# Altium PCB Main.PcbDoc
Units mil, origin at the board's own origin, x right, y up, seen from the top; angles counter-clockwise.
Board outline 2427.55 x 1498.92 mil, 2 copper layers (Top Layer, Bottom Layer), stack 61.756 mil thick; 34 components, 26 nets, 146 pads, 46 vias.
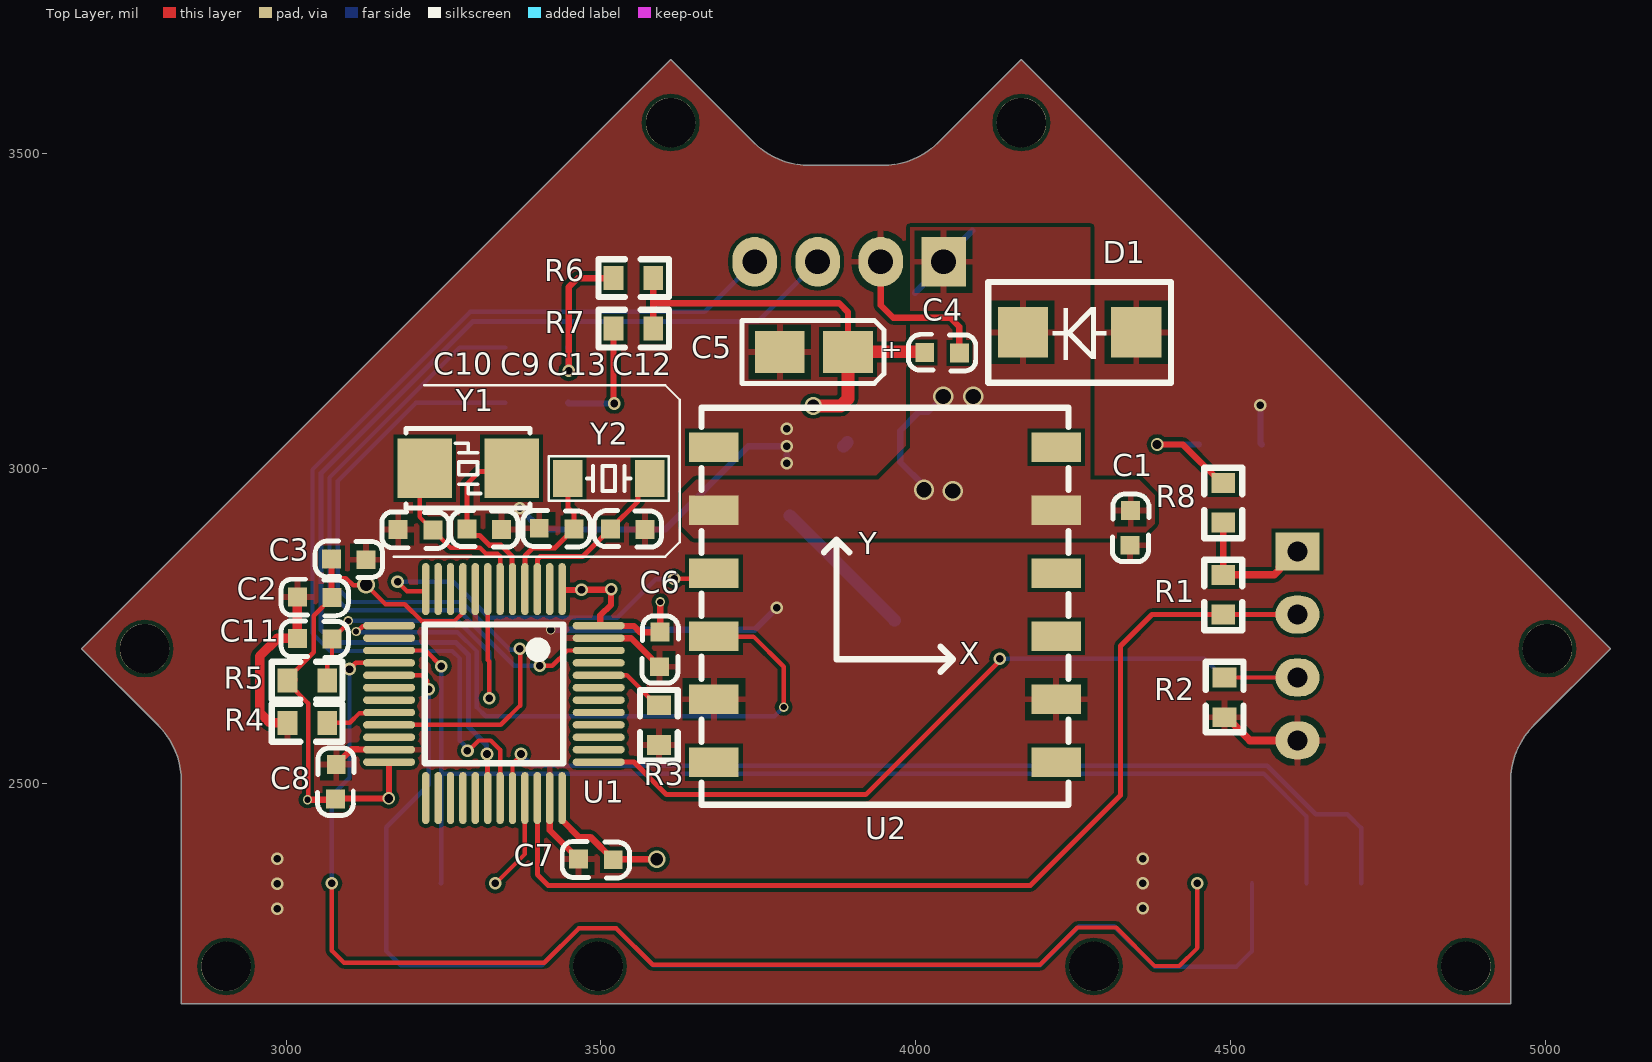
[diagram p0: Top Layer view]
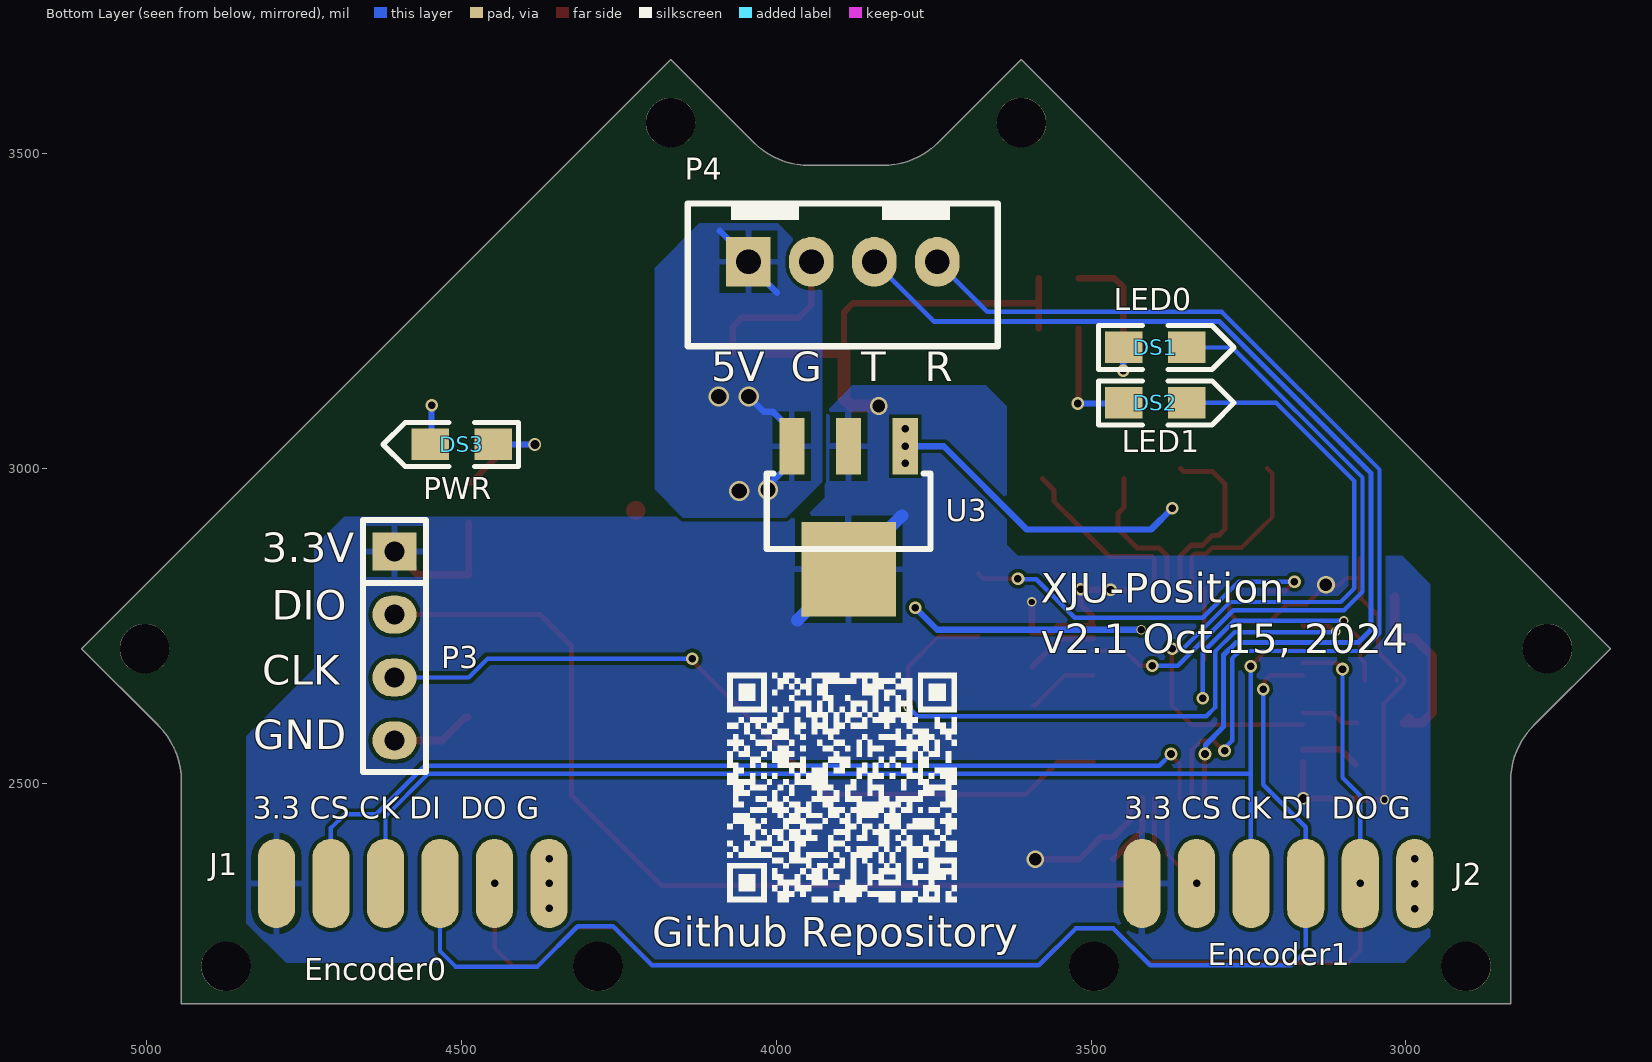
[diagram p1: Bottom Layer view, seen from below]
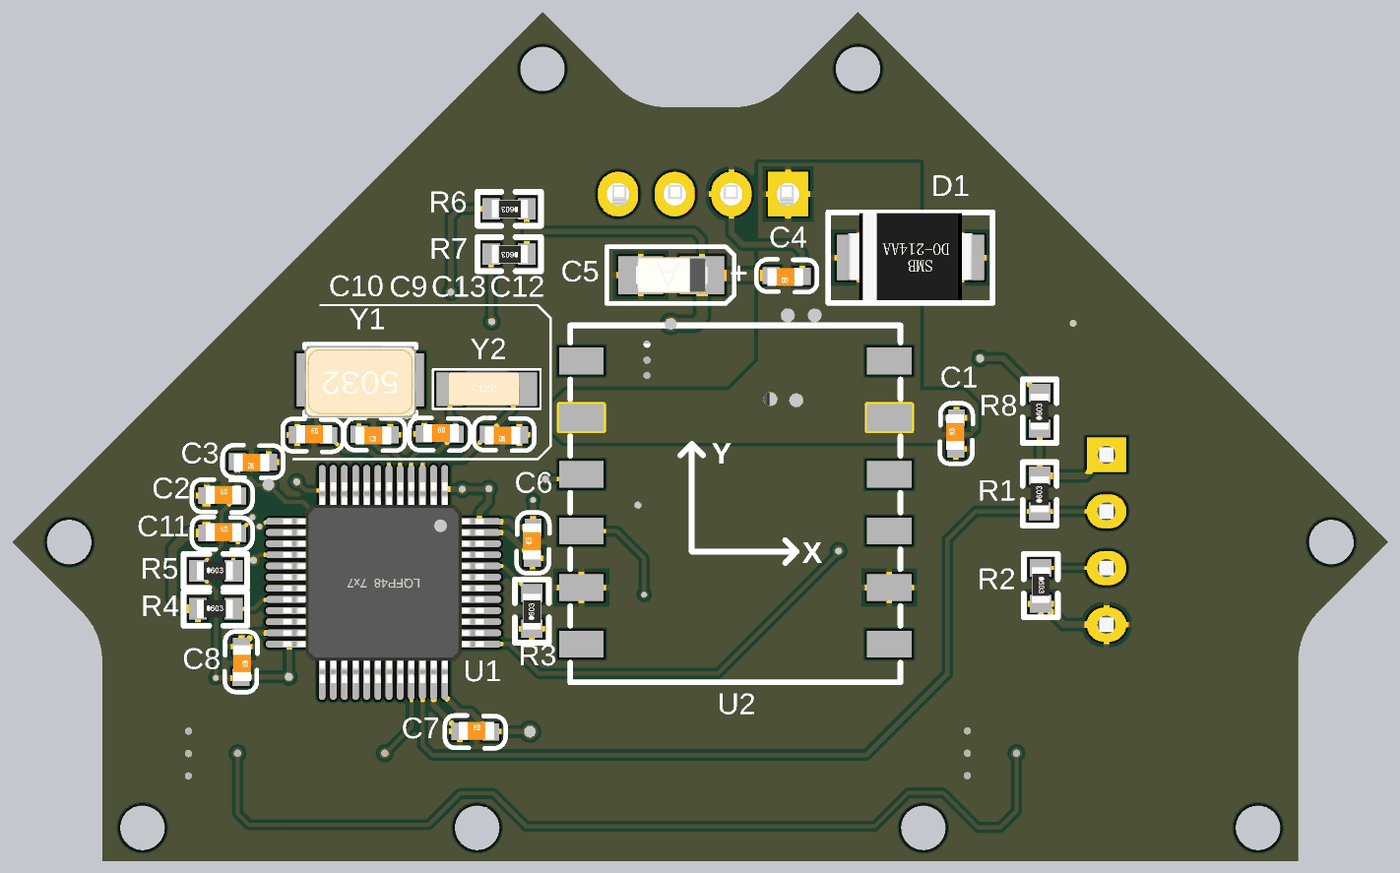
[diagram p2: 3D render of the assembled board from above, using the file's embedded part models]
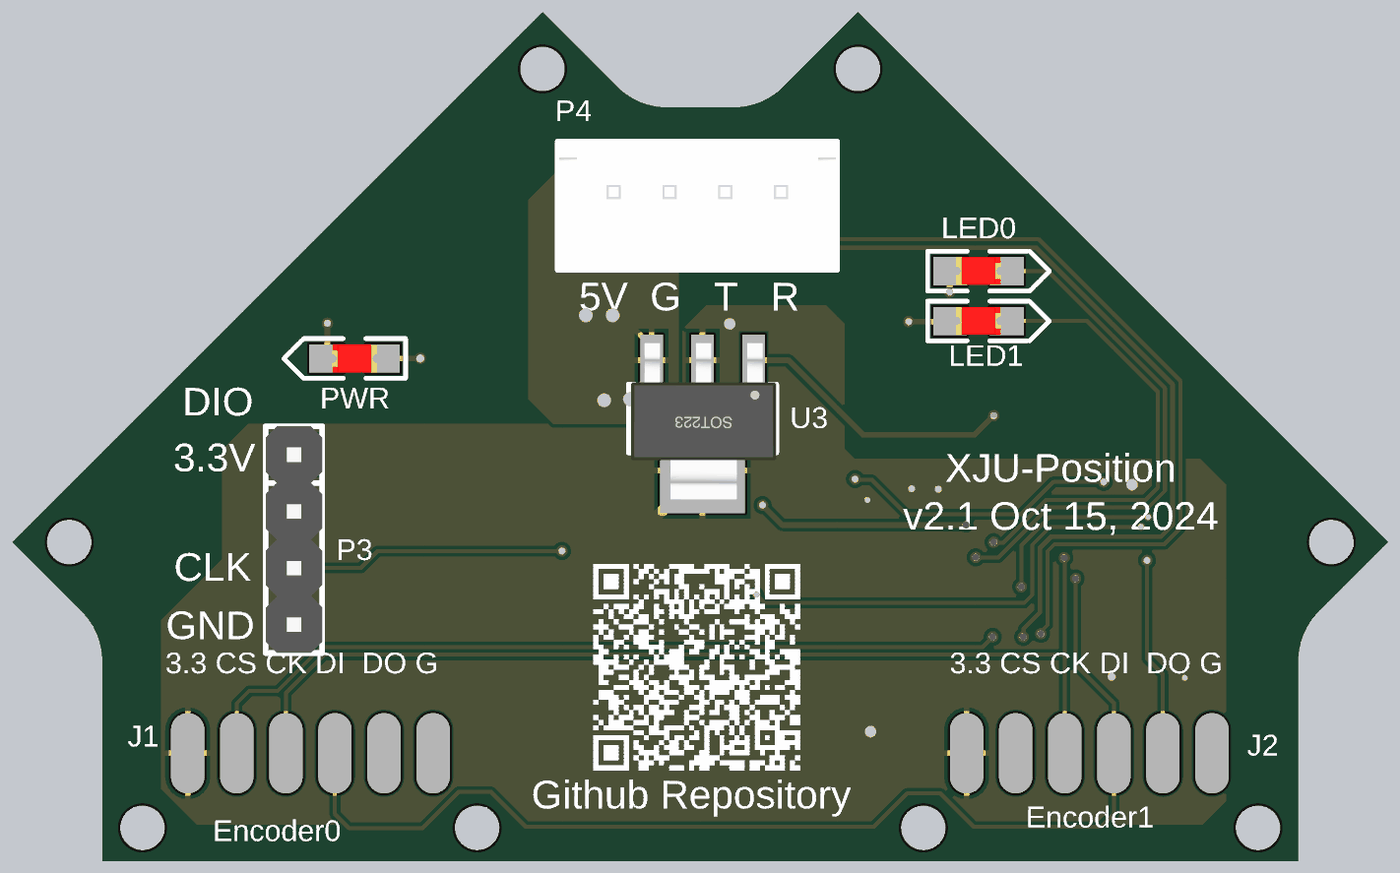
[diagram p3: 3D render of the assembled board from below, using the file's embedded part models]

## Layer stack, top to bottom
Top Solder: solder mask 1, SM-001, Dk 4
Top Layer: signal copper 1.378
Dielectric 1: core 59, Core-043, Dk 4.3
Bottom Layer: signal copper 1.378
Bottom Solder: solder mask 1, SM-001, Dk 4

## Board outline
2833.91,2150.25 2833.91,2502.94 ccw(c2707.92,2502.94) 2797.01,2592.03 2675.25,2713.78 3610.64,3649.17 3741.94,3517.86 ccw(c3831.03,3606.94) 3831.03,3480.96 3947.02,3480.96 ccw(c3947.02,3606.94) 4036.1,3517.86 4167.41,3649.17 5102.8,2713.78 4981.04,2592.03 ccw(c5070.13,2502.94) 4944.14,2502.94 4944.14,2150.25

## Design rules (kind name [scope] priority, off if disabled: settings)
Clearance [All] p1: gap=6 ignorepadtopadclearanceinfootprint=FALSE
DiffPairsRouting [All] p1: maxlimit=10 minlimit=6 mostfreqgap=6 toplayer_minwidth=6 toplayer_maxwidth=15 toplayer_prefwidth=6 bottomlayer_minwidth=6 bottomlayer_maxwidth=15 bottomlayer_prefwidth=6 maxuncoupledlength=500
HoleToHoleClearance [All] p1: gap=6 allowstackedmicrovias=TRUE
MinimumSolderMaskSliver [All] p1: minsoldermaskwidth=1
PolygonConnect [All] p1: thpad.connectstyle=Relief thpad.reliefconductorwidth=10 thpad.reliefentries=4 thpad.polygonreliefangle="90 Angle" thpad.airgapwidth=10 smdpad.connectstyle=Relief smdpad.reliefconductorwidth=10 smdpad.reliefentries=4 smdpad.polygonreliefangle="90 Angle" smdpad.airgapwidth=10 via.connectstyle=Direct via.reliefconductorwidth=10 via.reliefentries=4 via.polygonreliefangle="90 Angle" via.airgapwidth=10
RoutingVias [All] p1: holewidth=12 width=50 viastyle="Through Hole" minholewidth=9.84 minwidth=11.81 maxholewidth=248.03 maxwidth=50
SilkToSilkClearance [All] p1: silktosilkclearance=0
SilkToSolderMaskClearance [IsPad] p1: minsilkscreentomaskgap=0 clearancetoexposedcopper=TRUE
SolderMaskExpansion [All] p1: expansion=4 istentingtop=FALSE
Width [All] p1: maxlimit=50 minlimit=7 preferedwidth=10
25 further rules are at their usual default settings.

## Components (designator, comment, footprint, x,y, rotation, side; value= is the part's Value field where it differs from the comment)
C1 "Capacitor" 0603C 4339.65,2877.79 r90 top value=104
C2 "Capacitor" 0603C 3017.79,2796.35 r0 top value=104
C3 "Capacitor" 0603C 3127.21,2854.65 r180 top value=10uF
C4 "Capacitor" 0603C 4069.21,3182.65 r180 top value=104
C5 "Capacitor" TAJ-A/3216 3894,3185 r180 top value=10uF/16V
C6 "Capacitor" 0603C 3592.65,2684.79 r90 top value=100nF
C7 "Capacitor" 0603C 3464.29,2379.96 r0 top value=100nF
C8 "Capacitor" 0603C 3080,2530 r270 top value=100nF
C9 "Capacitor" 0603C 3342.21,2902.65 r180 top value=22pF
C10 "Capacitor" 0603C 3177.79,2903.35 r0 top value=22pF
C11 "Capacitor" 0603C 3017.79,2730.35 r0 top value=104
C12 "Capacitor" 0603C 3570.21,2902.64 r180 top value=8pF
C13 "Capacitor" 0603C 3401.79,2905.35 r0 top value=8pF
D1 "TVS Diode" SMB/DO-214AA 4350,3216 r180 top value=SMBJ5.0A
DS1 "LED0" LED-0805R 3448.01,3192.02 r180 bottom value=Blue
DS2 "LED1" LED-0805R 3448.01,3104.01 r180 bottom value=Red
DS3 "PWR" LED-0805R 4449,3037.99 r0 bottom value=Green
J1 "Encoder0" 6P_SMD 4793.46,2341 r180 bottom
J2 "Encoder1" 6P_SMD 3419,2341 r180 bottom
P3 "SWD" "Pin HDR1X4/2.54mm-S" 4606,2868 r180 bottom
P4 "Data IO" XH4/2.54mm/180 4044,3328 r180 bottom
R1 "Resistor" 0603R 4488,2768 r90 top value=10K
R2 "Resistor" 0603R 4490,2668 r270 top value=10K
R3 "Resistor" 0603R 3592,2561.01 r90 top value=10K
R4 "Resistor" 0603R 3002.47,2596 r0 top value=10K
R5 "Resistor" 0603R 3002.47,2663.02 r0 top value=10K
R6 "Resistor" 0603R 3582.99,3302 r180 top value=510R
R7 "Resistor" 0603R 3582.99,3222 r180 top value=510R
R8 "Resistor" 0603R 4488,2914 r90 top value=510R
U1 "ST MCU LQFP48" "LQFP48 7X7" 3330,2642 r180 top value=STM32F103C8T6
U2 "JY901S" JY901S 3954,2787 r0 top
U3 "AMS1117-3.3" SOT223 3885,3035 r0 bottom
Y1 "Crystal Oscillator" "OSC 5032-2P" 3289.1,3000 r180 top value=8MHz
Y2 "Crystal Oscillator" "OSC 3215-2P" 3512.29,2983.92 r180 top value=32.768kHz

## Footprints (in the part's own frame and the unit in brackets; to place one, negate y for a bottom-side part, rotate by r counter-clockwise, add the part's x,y. Pads: shape width x height; smd on the part's side, far side on the other; paste and mask are expansions set on the pad)
6P_SMD [mm]
  oval 1.5x3.6 smd: 1(0,0) 2(2.2,0) 3(4.4,0) 4(6.6,0) 5(8.8,0) 6(11,0)
0603C [mil]
  rect 30x30 smd: 1(0.21,-0.35) 2(55.21,-1.35)
  silkscreen extent -26,-30 81,28, body extent -1,-15 62,17, height 12
0603R [mm]
  rect 0.8x0.965 smd: 1(0,0) 2(1.6,0)
  silkscreen extent -0.64,-0.76 2.21,0.76, body extent -0.04,-0.41 1.56,0.41, height 0.45
JY901S [mm]
  rect 2x1.2 smd: 1(-6.976,6.26) 2(-6.976,3.72) 3(-6.976,1.18) 4(-6.976,-1.36) 5(-6.976,-3.9) 6(-6.976,-6.44) 7(6.824,-6.44) 8(6.824,-3.9) 9(6.824,-1.36) 10(6.824,1.18) 11(6.824,3.72) 12(6.824,6.26)
  silkscreen extent -7.48,-8.15 7.32,7.85
LED-0805R [mil]
  rect 60x50 smd: A(0,0) K(100,0)
  silkscreen extent -40,-35 175,35, body extent 11,-24 89,25, height 32
"LQFP48 7X7" [mm]
  oval 0.3x2.1 smd: 1(-2.75,-4.227) 2(-2.25,-4.227) 3(-1.75,-4.227) 4(-1.25,-4.227) 5(-0.75,-4.227) 6(-0.25,-4.227) 7(0.25,-4.227) 8(0.75,-4.227) 9(1.25,-4.227) 10(1.75,-4.227) 11(2.25,-4.227) 12(2.75,-4.227) 25(2.75,4.202) 26(2.25,4.202) 27(1.75,4.202) 28(1.25,4.202) 29(0.75,4.202) 30(0.25,4.202) 31(-0.25,4.202) 32(-0.75,4.202) 33(-1.25,4.202) 34(-1.75,4.202) 35(-2.25,4.202) 36(-2.75,4.202)
  oval 2.1x0.3 smd: 13(4.227,-2.75) 14(4.227,-2.25) 15(4.227,-1.75) 16(4.227,-1.25) 17(4.227,-0.75) 18(4.227,-0.25) 19(4.227,0.25) 20(4.227,0.75) 21(4.227,1.25) 22(4.227,1.75) 23(4.227,2.25) 24(4.227,2.75) 37(-4.227,2.75) 38(-4.227,2.25) 39(-4.227,1.75) 40(-4.227,1.25) 41(-4.227,0.75) 42(-4.227,0.25) 43(-4.227,-0.25) 44(-4.227,-0.75) 45(-4.227,-1.25) 46(-4.227,-1.75) 47(-4.227,-2.25) 48(-4.227,-2.75)
  silkscreen extent -2.79,-2.79 2.79,2.79, body extent -4.51,-4.5 4.5,4.5, height 1.45
"OSC 3215-2P" [mm]
  rect 1.2x1.5 smd: 1(-1.65,0) 2(1.65,0)
  silkscreen extent -2.41,-0.89 2.41,0.89, body extent -1.47,-0.76 1.73,0.74, height 0.61
"OSC 5032-2P" [mm]
  rect 2.2x2.4 smd: 1(-1.75,0) 2(1.75,0)
  silkscreen extent -2.5,-1.6 2.5,1.6, body extent -2.5,-1.52 2.5,1.68, height 0.86
"Pin HDR1X4/2.54mm-S" [mil]
  rect 70x60 hole 32: 1(0,0)
  oval 70x60 hole 32: 2(0,-100) 3(0,-200) 4(0,-300)
  silkscreen extent -50,-350 50,50, body extent -50,-350 50,50, height 336
SMB/DO-214AA [mil] "塑封二极管"
  rect 80x80 smd: A(0,0) K(180,0)
  silkscreen extent -55,-80 235,80, body extent -20,-79 200,75, height 98
SOT223 [mil]
  rect 40x90 smd: 1(-90,0) 2(0,0) 3(90,0)
  rect 150x150 smd: 2(0,195)
  silkscreen extent -130,43 130,163, body extent -130,-30 126,246, height 65
TAJ-A/3216 [mm]
  rect 2x1.7 smd: 1(0.047,0) 2(2.794,0)
  silkscreen extent -1.4,-1.27 4.32,1.27, body extent -0.2,-0.8 3,0.8, height 1.6
XH4/2.54mm/180 [mm]
  rect 1.8x2 hole 1: 1(0,0)
  oval 1.8x2 hole 1: 2(2.54,0) 3(5.08,0) 4(7.62,0)
  silkscreen extent -2.45,-3.4 10.07,2.35, body extent -2.39,-3.3 10.01,2.45, height 7

## Part data
C1 C2 C3 C4 C6 C7 C8 C9 C10 C11 C12 C13: library part Cap, LatestRevisionDate=17-Jul-2002, LatestRevisionNote="Re-released for DXP Platform.", PackageReference=RAD-0.3, Published=8-Jun-2000, Publisher="Altium Limited"
  C2 C3 C6 C7 C8 C9 C10 C11 C12 C13: PackageDescription="Radial Cap, Thru-Hole; 2 Leads; 0.3 in Pin Spacing"
C5: library part "Cap Pol1", "Polarized Capacitor (Radial)", LatestRevisionDate=17-Jul-2002, LatestRevisionNote="Re-released for DXP Platform.", PackageReference=RB7.6-15, Published=8-Jun-2000, Publisher="Altium Limited"
D1: library part "DIODE ZENER", "稳压二极管"
DS1 DS3: library part LED1, "Typical RED GaAs LED", LatestRevisionDate=08-Jul-2005, LatestRevisionNote="Mech Layer 1 removed.", PackageDescription="LED; 2 Leads", PackageReference=LED-1, Published=8-Jun-2000, Publisher="Altium Limited"
DS2: "Typical RED GaAs LED", LatestRevisionDate=08-Jul-2005, LatestRevisionNote="Mech Layer 1 removed.", PackageDescription="LED; 2 Leads", PackageReference=LED-1, Published=8-Jun-2000, Publisher="Altium Limited"
J1 J2: library part "Header 6"
P3 P4: library part "Header 4", "Header, 4-Pin", LatestRevisionDate=17-Jul-2002, LatestRevisionNote="Re-released for DXP Platform.", Publisher="Altium Limited"
R1 R2 R3 R4 R5 R6 R7 R8: library part Res2, LatestRevisionDate=17-Jul-2002, LatestRevisionNote="Re-released for DXP Platform.", PackageDescription="Axial Device, Thru-Hole; 2 Leads; 0.4 in Pin Spacing", PackageReference=AXIAL-0.4, Published=8-Jun-2000, Publisher="Altium Limited"
U1: library part STM32F103C8T6
U3: library part AMS1117
Y1 Y2: library part XTAL

## Free pads (board coordinates)
  round 78.74 hole 78.74 unplated: 1(2775.47,2713.78) 1(2904.77,2209.31) 1(3495.32,2209.31) 1(3610.64,3548.95) 1(4167.41,3548.95) 1(4282.72,2209.31) 1(4873.28,2209.31) 1(5002.58,2713.78)

## Via types
v1: diameter 20, hole 12, Top Layer to Bottom Layer, tented both sides, 31 vias
v2: diameter 15, hole 10, Top Layer to Bottom Layer, tented both sides, 5 vias
v3: diameter 32, hole 24, Top Layer to Bottom Layer, tented both sides, 4 vias
v4: diameter 28, hole 20, Top Layer to Bottom Layer, tented both sides, 3 vias
v5: diameter 20, hole 14, Top Layer to Bottom Layer, tented both sides, 2 vias
v6: diameter 15, hole 12, Top Layer to Bottom Layer, tented both sides, 1 vias

## Nets (pads, with @x,y where several pads share a name; then routed paths per layer and width w, separated by ;. In a path a pad name is that pad's centre, name@x,y a point inside that pad or via, vN(x,y) a via of type N, cw(c..) or ccw(c..) an arc to the next point about the centre after c; other vN are vias at no path point)
3.3V: C2.2 C3.2 C4.2 C5.1 C6.2 C7.2 C8.2 J1.1 J2.1 P3.1 R1.2 R5.1 R6.1 R7.1 R8.1 U1.1 U1.9 U1.24 U1.36 U1.48 U3.2 | length 2586
  Top Layer w7: R5.1@3014.47,2663.02 R5.1@3014.47,2666.27 ; v2@3034.79,2474.79 3035,2475 3035,2627.24 3002.47,2659.77 R5.1 3002.47,2666.27 3044.11,2707.91 3044.11,2766.11 C2.2 ; 3072,2826 3095,2826 3106.6,2814.4 3127.8,2814.4 v4@3130.6,2811.6 ; v4(3127,2815.2) v4@3130.6,2811.6 ; U1.9 3280.79,2770.88 3267.48,2757.58 3215.35,2757.58 3188.55,2784.38 3157.82,2784.38 v4@3130.6,2811.6
  Top Layer w10: v2(3034,2474) 3034.79,2474.79 3035.57,2474 3077.86,2474 C8.2 3079.86,2476 v5(3163,2476) ; C3.2 3072,2826 3072,2796 C2.2 ; v5@3163.58,2476 U1.24 ; U1.36 3438.27,2441.15 3464.71,2414.71 3483.4,2414.71 C7.2 3520.11,2379.22 v4(3588.5,2379.22) ; U1.1 3438.27,2807.84 3439.1,2807 v1(3469.05,2807) 3469.55,2807.5 3515.5,2807.5 v1(3516,2808) 3516,2783.74 3499,2766.74 3499,2751.1 U1.48@3497.82,2749.92 ; U1.48@3496.76,2749.92 U1.48@3497.82,2749.92 ; R7.1 3582.99,3262 ; R6.1 3582.99,3262 ; v2(3594,2788) C6.2 3562,2740 3552.08,2749.92 U1.48@3497.82,2749.92 ; C5.1 3892.15,3247.85 3878,3262 3582.99,3262 ; R1.2 R8.1
  Top Layer w12: R1.2 4568.99,2830.99 4577,2839 4577,2844 4601,2868 P3.1
  Top Layer w20: v4(3837,3099) 3880.43,3099 3892.15,3110.72 C5.1 C4.2@4014,3185
  Bottom Layer w20: 3800,2925 3885,2840 3966,2759 ; v4@3835.47,3100.53 v4(3837,3099) ; U3.2@3885,3035 U3.2@3891.24,3041.24
5V: C1.2 D1.K P4.1 U2.2 U2.11 U3.3 | length 338.2
  Top Layer w30: U2.11 U2.11@4223.12,2933
  Bottom Layer w10: 3998.57,3278.63 4044,3324.06 P4.1 4044,3331.94 4089.43,3377.37 ; v3(4013.03,2966.03) 4013.03,2971.97 3975,3010 U3.3 3975,3060 4005,3090 4019.5,3090 v3(4043.5,3114)
  Bottom Layer w30: v3@4012.65,2966.41 v3(4013.03,2966.03)
  other v3: 4058.5,2964 4091,3114
BOOT0: R3.2 U1.44 | length 115.3
  Top Layer w7: U1.44 3541.22,2671.53 3588.75,2624 R3.2
BOOT1: R4.2 U1.20 | length 92.9
  Top Layer w7: R4.2@3077.46,2596 3101,2596 3116.55,2611.55 3162.66,2611.55 U1.20
GND: C1.1 C2.1 C3.1 C4.1 C5.2 C6.1 C7.1 C8.1 C9.1 C10.1 C11.1 C12.1 C13.1 D1.A DS3.K J1.6 J2.6 P3.4 P4.2 R2.2 R3.1 R4.1 U1.8 U1.23 U1.35 U1.47 U2.5 U2.8 U3.1 | length 1939
  Top Layer w10: C8.1 3103.86,2554 3113.86,2554 3114.09,2553.76 3163.24,2553.76 U1.23 ; U1.35 3418.58,2425.53 C7.1 ; U1.47 3496.76,2730.24 3547.76,2730.24 C6.1 ; P4.2 3944,3259 3964,3239 4055,3239 4069,3225 C4.1
  Top Layer w12: R2.2 4493.25,2605.01 4530.26,2568 P3.4
  Top Layer w15: R4.1@2994.92,2603.55 R4.1 2974.69,2596 2958,2612.69 2958,2701.75 2986.25,2730 C11.1 C2.1
  Bottom Layer w10: v1(3371,2936.76) 3404.76,2903 3602,2903 3734,3035 v1(3795,3035) ; v6(3420,2744) 3744,2744 v1(3779,2779) ; v1(3795,3008) U3.1@3795,3022.14 ; v1(4547,3100) 4547,3039.99 DS3.K
  other v1: 2985.93,2301 4360.39,2301.5 2985.93,2340.5 4360.39,2341 2985.93,2380 4360.39,2380.5 3795,3063
HSE_N: C9.2 U1.5 Y1.1 | length 294.6
  Top Layer w8: Y1.1 3353.38,2995.38 3307.38,2995.38 3287,2975 C9.2 3297.56,2893.44 3307.41,2893.44 3322.86,2878 3341.33,2878 3358.8,2860.54 3358.8,2809.15 U1.5
HSE_P: C10.2 U1.6 Y1.2 | length 286.2
  Top Layer w7: Y1.2 3212,2991.8 3212,2923 C10.2 3261.06,2873.94 3307.82,2873.94 3317.27,2864.5 3335.74,2864.5 3339.84,2860.4 U1.6
JY901S_RX: U1.12 U2.3 | length 608.8
  Top Layer w7: v1(3177,2820) 3192,2805 3219.51,2805 3219.51,2806.2 U1.12 ; v1(3616,2825) 3670.9,2825 U2.3
  Bottom Layer w7: v1(3177,2820) 3265.72,2820 3322.72,2763 3526,2763 3587,2824 v1@3617,2824
JY901S_TX: U1.13 U2.4 | length 1043.5
  Top Layer w7: v2(3111.19,2741) 3113.35,2741 3121.69,2749.35 3162.66,2749.35 U1.13 ; U2.4 3679.81,2733 3742,2733 3790,2685 v2(3790,2621)
  Bottom Layer w7: v2(3111.19,2741) 3112.19,2740 3272.18,2740 3303,2709.18 3303,2620.42 3316.92,2606.5 3775.5,2606.5 v2(3790,2621)
LED0: DS1.K U1.46 | length 1032
  Top Layer w7: v1(3402.91,2686.74) 3422.74,2686.74 3446.9,2710.9 U1.46
  Bottom Layer w7: DS1.K 3275.64,3192.02 3069,2985.38 3069,2804 3098.17,2774.83 3274.12,2774.83 3362.21,2686.74 v1(3402.91,2686.74)
LED1: DS2.K U1.21 | length 1128.8
  Top Layer w7: U1.21 3340.9,2592.79 3371.5,2623.39 3371.5,2713.26 v1(3371.22,2713.54)
  Bottom Layer w7: DS2.K 3206.01,3104.01 3082,2980 3082,2809.38 3103.55,2787.83 3279.5,2787.83 3355.02,2712.32 3370.01,2712.32 v1(3371.22,2713.54)
LSE_N: C12.2 U1.3 Y2.1 | length 288.7
  Top Layer w8: U1.3 3398.9,2855.07 3403.58,2859.76 3470.76,2859.76 C12.2 3559.02,2948.02 3559.02,2965.69 Y2.1
LSE_P: C13.2 U1.4 Y2.2 | length 232.2
  Top Layer w8: U1.4 3379.21,2861.19 3391.78,2873.76 3426.76,2873.76 C13.2 3457,2928.65 3447.32,2938.32 Y2.2
NetDS1_1: DS1.A R6.2 | length 247.2
  Top Layer w10: v1(3449,3155) 3449,3288 3463,3302 R6.2
  Bottom Layer w10: DS1.A 3449,3191.03 v1(3449,3155)
NetDS2_1: DS2.A R7.2 | length 192.8
  Top Layer w10: R7.2 3520,3104 v1(3521,3103)
  Bottom Layer w10: DS2.A 3449.02,3103 v1(3521,3103)
NetDS3_1: DS3.A R8.2 | length 196.3
  Top Layer w10: v5(4383,3038) 4423.74,3038 4484.75,2976.99 R8.2
  Bottom Layer w10: v5(4383,3038) DS3.A
RESET: C11.2 R5.2 U1.7 | length 600.6
  Top Layer w7: R5.2 3065.46,2691.46 3073,2699 C11.2 3097.1,2753.1 3097.1,2756.3 v2(3098.63,2757.83) ; U1.7 3320.16,2695.84 3322.5,2693.5 v1(3322.5,2635)
  Bottom Layer w7: v2(3098.63,2757.83) 3098.8,2758 3272.57,2758 3322.5,2708.07 v1(3322.5,2635)
SPI_CLK: J1.3 J2.3 U1.15 | length 1947.1
  Top Layer w7: U1.15 3221.68,2710.9 v1(3246.58,2686)
  Bottom Layer w7: J2.3 3246.17,2341.4 3246.17,2515 ; v1(3246.58,2686) 3246.17,2685.6 3246.17,2515 ; J1.3 4620.23,2447.39 4552.62,2515 3246.17,2515
SPI_CS0: J1.2 U1.32 | length 1546.1
  Top Layer w7: U1.32 3359.53,2530.98 3373,2544.45 v1(3373,2546.5)
  Bottom Layer w7: v1(3373,2546.5) 3391.5,2528 4558,2528 4635,2451 4685,2451 4706.84,2429.16 J1.2
SPI_CS1: J2.2 U1.33 | length 155
  Top Layer w7: v1(3332.39,2341) 3379.21,2387.83 U1.33
SPI_MISO: J1.5 J2.5 U1.16 | length 2118.8
  Top Layer w7: v1(3072.54,2341) 3072.54,2234.46 3092,2215 3410,2215 3465,2270 3524,2270 3582,2212 4197,2212 4256,2271 4318,2271 4379,2210 4418.3,2210 4447,2238.7 v1(4447,2341) ; v1(3100.73,2681.44) 3110.5,2691.21 U1.16
  Bottom Layer w7: v1(3072.54,2341) 3072.54,2480.54 3100.73,2508.73 v1(3100.73,2681.44)
SPI_MOSI: J1.4 J2.4 U1.17 | length 2124.7
  Top Layer w7: U1.17 3215.42,2671.53 3224.19,2662.76 3224.19,2651.95 v1(3226.67,2649.46)
  Bottom Layer w7: v1(3226.67,2649.46) 3226.67,2497.67 3159.16,2430.16 J2.4 3159.25,2340.91 3159.25,2233.75 3182,2211 3406,2211 3465,2270 3524,2270 3583,2211 4197,2211 4259,2273 4315,2273 4379,2209 4509,2209 4533.61,2233.61 J1.4
SWCLK: P3.3 R2.1 U1.37 | length 1350.8
  Top Layer w7: R2.1 P3.3
  Top Layer w8: U1.37 3552.27,2533.73 3604,2482 3920.2,2482 4133,2694.8 v1(4133,2698)
  Bottom Layer w7: v1(4133,2698) 4458,2698 4488,2668 P3.3
SWDIO: P3.2 R1.1 U1.34 | length 1652.6
  Top Layer w8: U1.34 3398.9,2355.1 3416,2338 4182,2338 4325,2481 4325,2718 4375,2768 R1.1 P3.2
USART1_RX: P4.4 U1.31 | length 1641.5
  Top Layer w7: v1(3288,2552) 3289.94,2552 3305.94,2568 3325.08,2568 3339.84,2553.23 U1.31
  Bottom Layer w7: v1(3288,2552) 3288,2555.52 3276,2567.52 3276,2698 3264,2710 3070,2710 3042,2738 3042,2998.09 3292.67,3248.76 3664.76,3248.76 P4.4
USART1_TX: P4.3 U1.30 | length 1666.7
  Top Layer w8: v1(3319,2546.5) 3319.58,2545.92 3319.58,2477.16 U1.30
  Bottom Layer w8: v1(3319,2546.5) 3318.31,2547.19 3318.31,2560.92 3289.5,2589.73 3289.5,2685.17 3289.5,2696.59 3289.5,2703.59 3269.59,2723.5 3262.59,2723.5 3075.59,2723.5 3055.5,2743.59 3055.5,2992.5 3296,3233 3749,3233 P4.3
pads on no net: U1.2 U1.10 U1.11 U1.14 U1.18 U1.19 U1.22 U1.25 U1.26 U1.27 U1.28 U1.29 U1.38 U1.39 U1.40 U1.41 U1.42 U1.43 U1.45 U2.1 U2.6 U2.7 U2.9 U2.10 U2.12

## Polygon pours and split planes (outlines as drawn)
GND on Top Layer "Top_GND" (solid, remove dead copper, pour order 8): 2833.91,2150.25 2833.91,2502.94 ccw(c2707.92,2502.94) 2797.01,2592.03 2675.25,2713.78 3610.64,3649.17 3741.94,3517.86 ccw(c3831.03,3606.94) 3831.03,3480.96 3947.02,3480.96 ccw(c3947.02,3606.94) 4036.1,3517.86 4167.41,3649.17 5102.8,2713.78 4981.04,2592.03 ccw(c5070.13,2502.94) 4944.14,2502.94 4944.14,2150.25
5V on Top Layer "5V_L01_P001" (solid, remove dead copper, pour order 1): 3991,3383 4277,3383 4277,2982 4354.49,2982 4379,2957.49 4379,2912 4356,2889 3647,2889 3629,2907 3629,2960 3651,2982 3940,2982 3991,3033
3.3V on Bottom Layer "3.3V_L02_P009" (solid, remove dead copper, pour order 9): 3667,3132 3879,3132 3923,3088 3923,2953 3953,2923 4686,2923 4733,2876 4733,2683 4841,2575 4841,2278 4778,2215 3002,2215 2961,2256 2961,2816 3006,2861 3616,2861 3634,2879 3634,3099
5V on Bottom Layer "5V_L02_P000" (solid, remove dead copper, pour order 0): 3996,3389 4122,3389 4193,3318 4193,2967 4148,2922 3984,2922 3927,2979 3927,3319 4000,3392

## Silkscreen, mask and mechanical layers (free items; w line width, h text height)
Top Overlay:
  lines w3.94: 3171,2860 3602,2860 3625,2883 3625,3109 3602,3132 3219,3132
Bottom Overlay:
  drawing of 3804 lines, arcs and shapes, not listed
  text "5V  G   T   R" at 4103,3122.83 h80
  text "3.3V" at 4817,2835 h80
  text "DIO" at 4801,2744 h80
  text "XJU-Position / v2.1 Oct 15, 2024" at 3580.04,2691 h80
  text "CLK" at 4816,2641 h80
  text "GND" at 4830,2538 h80
  text "3.3 CS CK DI  DO G" at 3447,2432 h60
  text "3.3 CS CK DI  DO G" at 4831,2432 h60
  text "Github Repository" at 4196.44,2225 h80
Mechanical 1:
  circle w0.5: c4282.72,2209.31 r39.37
  circle w0.5: c5002.58,2713.78 r39.37
  circle w0.5: c4873.28,2209.31 r39.37
  circle w0.5: c3495.32,2209.31 r39.37
  circle w0.5: c2904.77,2209.31 r39.37
  circle w0.5: c2775.47,2713.78 r39.37
  circle w0.5: c4167.41,3548.95 r39.37
  circle w0.5: c3610.64,3548.95 r39.37
  lines w0.5: 2675.25,2713.78 3610.64,3649.17 3741.94,3517.86 ccw(c3831.03,3606.94) 3831.03,3480.96 3947.02,3480.96 ccw(c3947.02,3606.94) 4036.1,3517.86 4167.41,3649.17 5102.8,2713.78 4981.04,2592.03 ccw(c5070.13,2502.94) 4944.14,2502.94 4944.14,2150.25 4085.87,2150.25 3692.17,2150.25 2833.91,2150.25 2833.91,2502.94 ccw(c2707.92,2502.94) 2797.01,2592.03 2675.25,2713.78

## Text inside footprints (layer, text, board x,y; h text height)
C5: Top Overlay "+" at 3979,3200 h30 r180
U2: Top Overlay "X" at 4069,2677 h60; Top Overlay "Y" at 3909,2852 h60